# EAGLE board Cougar-eu_pcb_v54 (EAGLE 9.7.0)
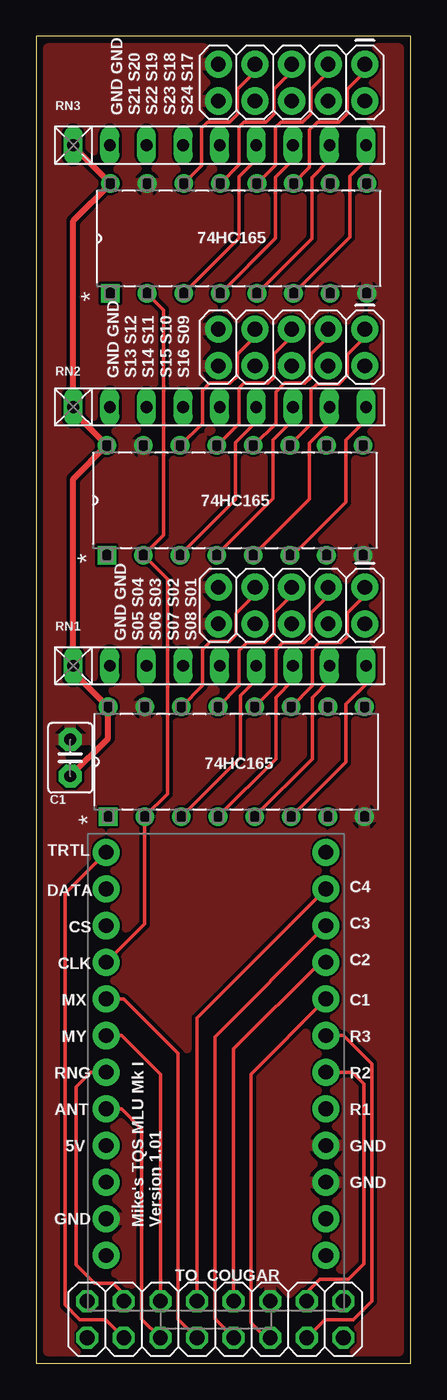
[diagram p0: board, top side]
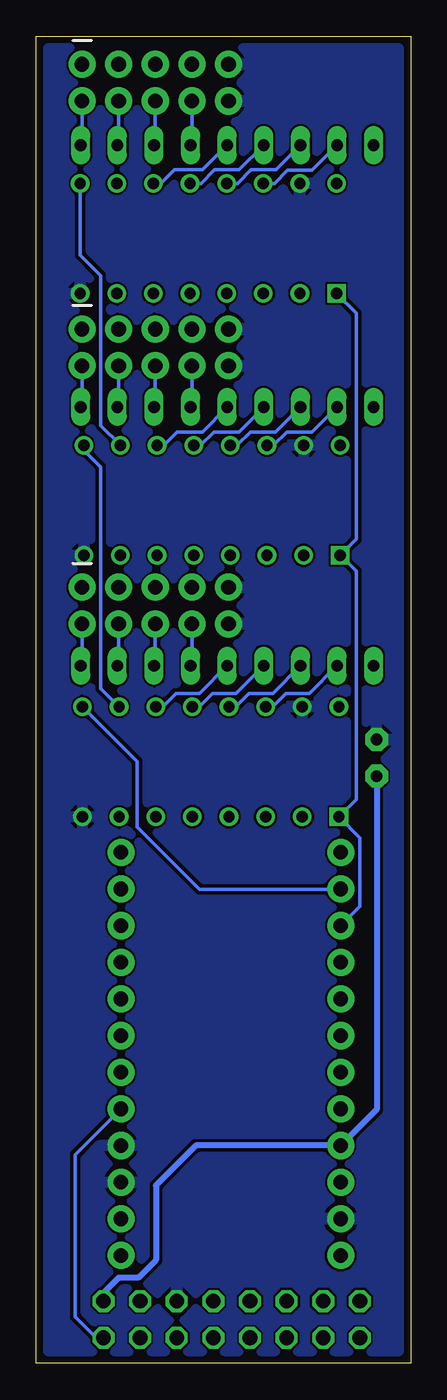
[diagram p1: board, bottom side, seen from below]

Size 26 x 92 mm. Coordinates in mm from the lower left corner, seen from the top.
Outline: 0,0 26,0 26,92 0,92 0,0
Copper layers (1*16): Top / Bottom
Stack-up Default Layer Stack: Top User Defined 0.035mm / Dielectric-1 User Defined 1.5mm / Bottom User Defined 0.035mm
Design rules "default *": minimum track width 10mil, minimum drill 0.5mm, track to track 10mil, track to pad 6mil, pad to pad 6mil, via to via 6mil, smd to smd 6mil, copper to edge 20mil, drill to drill 12mil, minimum pad ring 10mil, minimum via ring 8mil, stop-mask expansion 4mil, vias tented up to drill 0mil, thermal gap 10mil
Net classes: 1 Power: width 0.4 mm

## Footprints (pad centres in the part's own frame; a part is rotated, then mirrored left to right if it is on the bottom)
N16 = drill 0.787 pad 1.295 square: 1 -7.62,17.78 | drill 0.787 pad 1.295: 2 -7.62,15.24; 3 -7.62,12.7; 4 -7.62,10.16; 5 -7.62,7.62; 6 -7.62,5.08; 7 -7.62,2.54; 8 -7.62,0; 9 0,0; 10 0,2.54; 11 0,5.08; 12 0,7.62; 13 0,10.16; 14 0,12.7; 15 0,15.24; 16 0,17.78
SPARKFUN_PRO_MICRO = drill 1.016 pad 1.88: 1 -7.62,12.7; 2 -7.62,10.16; 3 -7.62,7.62; 4 -7.62,5.08; 5 -7.62,2.54; 6 -7.62,0; 7 -7.62,-2.54; 8 -7.62,-5.08; 9 -7.62,-7.62; 10 -7.62,-10.16; 11 -7.62,-12.7; 12 -7.62,-15.24; 13 7.62,-15.24; 14 7.62,-12.7; 15 7.62,-10.16; 16 7.62,-7.62; 17 7.62,-5.08; 18 7.62,-2.54; 19 7.62,0; 20 7.62,2.54; 21 7.62,5.08; 22 7.62,7.62; 23 7.62,10.16; 24 7.62,12.7
C2.5-3 = drill 0.813 pad 1.6 octagon: 1 -1.27,0; 2 1.27,0
RN-9 = drill 0.813 long: 1 -10.16,0; 2 -7.62,0; 3 -5.08,0; 4 -2.54,0; 5 0,0; 6 2.54,0; 7 5.08,0; 8 7.62,0; 9 10.16,0
2X5 = drill 1.016 pad 1.88: 1 0,0; 2 0,2.54; 3 2.54,0; 4 2.54,2.54; 5 5.08,0; 6 5.08,2.54; 7 7.62,0; 8 7.62,2.54; 9 10.16,0; 10 10.16,2.54
2X08 = drill 1.016 octagon: 1 -8.89,-1.27; 2 -8.89,1.27; 3 -6.35,-1.27; 4 -6.35,1.27; 5 -3.81,-1.27; 6 -3.81,1.27; 7 -1.27,-1.27; 8 -1.27,1.27; 9 1.27,-1.27; 10 1.27,1.27; 11 3.81,-1.27; 12 3.81,1.27; 13 6.35,-1.27; 14 6.35,1.27; 15 8.89,-1.27; 16 8.89,1.27

## Placement (x,y rotation side)
74HC165_1  SN74HC165NG4N16  [N16]  22.78,45.51 90 top
74HC165_2  SN74HC165NG4N16  [N16]  22.69,63.64 90 top
74HC165_3  SN74HC165NG4N16  [N16]  22.94,81.78 90 top
ARDUINO_PRO_MICRO  SPARKFUN_PRO_MICRO  [SPARKFUN_PRO_MICRO]  12.49,20.18 180 top
C1  100n  [C2.5-3]  2.37,41.98 270 top
RN1  10k  [RN-9]  12.74,48.36 0 top
RN2  10k  [RN-9]  12.74,66.29 0 top
RN3  10k  [RN-9]  12.74,84.44 0 top
S1  S01-08  [2X5]  22.81,53.8 180 top
S2  S09-16  [2X5]  22.81,71.69 180 top
S3  S17-24  [2X5]  22.81,90.04 180 top
TO_COUGAR  PINHD-2X8  [2X08]  12.43,3.05 180 top

## Library data of the parts
74HC165_1-74HC165_3 = 2022-07-30_21-57-33_Library; COPYRIGHT: Copyright (C) 2022 Ultra Librarian. All rights reserved.; MANUFACTURER_PART_NUMBER: SN74HC165NG4; MFR_NAME: Texas Instruments
ARDUINO_PRO_MICRO = SparkFun-Boards
C1 = capacitor-wima
RN1-RN3 = resistor-net; OC_FARNELL: unknown; OC_NEWARK: unknown
S1-S3 = SparkFun-Connectors; PROD_ID: CONN-08499; SF_ID: PRT-0778
TO_COUGAR = Connector; CATEGORY: CONNECTOR; SUB-CATEGORY: PIN-HEADER

## Nets
+5V [Power]: 74HC165_1.16 74HC165_2.16 74HC165_3.16 ARDUINO_PRO_MICRO.21 C1.2 RN1.1 RN2.1 RN3.1 TO_COUGAR.1
ANT: ARDUINO_PRO_MICRO.20 TO_COUGAR.12
AXTRTL: ARDUINO_PRO_MICRO.13 TO_COUGAR.14
C1: ARDUINO_PRO_MICRO.8 TO_COUGAR.6
C2: ARDUINO_PRO_MICRO.9 TO_COUGAR.7
C3: ARDUINO_PRO_MICRO.10 TO_COUGAR.8
C4: ARDUINO_PRO_MICRO.11 TO_COUGAR.9
GND: 74HC165_1.8 74HC165_1.15 74HC165_2.8 74HC165_2.15 74HC165_3.8 74HC165_3.15 ARDUINO_PRO_MICRO.3 ARDUINO_PRO_MICRO.4 ARDUINO_PRO_MICRO.23 C1.1 S1.9 S1.10 S2.9 S2.10 S3.9 S3.10 TO_COUGAR.5
MIX: ARDUINO_PRO_MICRO.17 TO_COUGAR.10
MIY: ARDUINO_PRO_MICRO.18 TO_COUGAR.11
N$1: 74HC165_1.10 74HC165_2.9
N$2: 74HC165_2.10 74HC165_3.9
R1: ARDUINO_PRO_MICRO.5 TO_COUGAR.2
R2: ARDUINO_PRO_MICRO.6 TO_COUGAR.3
R3: ARDUINO_PRO_MICRO.7 TO_COUGAR.4
RAW: ARDUINO_PRO_MICRO.24
RNG: ARDUINO_PRO_MICRO.19 TO_COUGAR.13
S01: 74HC165_1.11 RN1.5 S1.1
S02: 74HC165_1.12 RN1.4 S1.3
S03: 74HC165_1.13 RN1.3 S1.5
S04: 74HC165_1.14 RN1.2 S1.7
S05: 74HC165_1.3 RN1.6 S1.8
S06: 74HC165_1.4 RN1.7 S1.6
S07: 74HC165_1.5 RN1.8 S1.4
S08: 74HC165_1.6 RN1.9 S1.2
S09: 74HC165_2.11 RN2.5 S2.1
S10: 74HC165_2.12 RN2.4 S2.3
S11: 74HC165_2.13 RN2.3 S2.5
S12: 74HC165_2.14 RN2.2 S2.7
S13: 74HC165_2.3 RN2.6 S2.8
S14: 74HC165_2.4 RN2.7 S2.6
S15: 74HC165_2.5 RN2.8 S2.4
S16: 74HC165_2.6 RN2.9 S2.2
S17: 74HC165_3.11 RN3.5 S3.1
S18: 74HC165_3.12 RN3.4 S3.3
S19: 74HC165_3.13 RN3.3 S3.5
S20: 74HC165_3.14 RN3.2 S3.7
S21: 74HC165_3.3 RN3.6 S3.8
S22: 74HC165_3.4 RN3.7 S3.6
S23: 74HC165_3.5 RN3.8 S3.4
S24: 74HC165_3.6 RN3.9 S3.2
SCLK: 74HC165_1.2 74HC165_2.2 74HC165_3.2 ARDUINO_PRO_MICRO.16
SLOAD: 74HC165_1.1 74HC165_2.1 74HC165_3.1 ARDUINO_PRO_MICRO.15
SOUT: 74HC165_1.9 ARDUINO_PRO_MICRO.14

## Tracks (layer width: path | path; a pad name or v marks a point on that pad's centre or on a via)
+5V
  Top 0.4: C1.2 5,43.33 74HC165_1.16 2.58,47.93 RN1.1 2.58,61.31 74HC165_2.16 2.58,65.96 RN2.1 2.58,79.2 74HC165_3.16 2.58,84.36 RN3.1
  Bottom 0.4: TO_COUGAR.1 21.32,4.89 20.27,5.94 18.9,5.94 17.68,7.16 17.68,12.34 14.92,15.1 ARDUINO_PRO_MICRO.21 2.37,17.6 C1.2
ANT
  Top 0.254: TO_COUGAR.12 7.34,3.06 7.34,16.24 5.93,17.64 ARDUINO_PRO_MICRO.20
AXTRTL
  Top 0.254: TO_COUGAR.14 4.82,3.04 3.04,3.04 2.02,4.05 2.02,32.58 ARDUINO_PRO_MICRO.13
C1
  Top 0.254: ARDUINO_PRO_MICRO.8 14.9,20.05 14.9,2.82 15.94,1.78 TO_COUGAR.6
C2
  Top 0.254: TO_COUGAR.7 13.7,21.8 19.71,27.8 ARDUINO_PRO_MICRO.9
C3
  Top 0.254: ARDUINO_PRO_MICRO.10 12.4,22.63 12.4,3.08 TO_COUGAR.8
C4
  Top 0.254: TO_COUGAR.9 11.16,23.94 ARDUINO_PRO_MICRO.11
GND
  pour Bottom: 26.01,0 0,0 0,92 26.01,92
  pour Top: 26.42,0 0,0 0,92.3 26.42,92.3
MIX
  Top 0.254: TO_COUGAR.10 9.87,3.07 9.87,21.48 6.09,25.26 ARDUINO_PRO_MICRO.17
MIY
  Top 0.254: TO_COUGAR.11 8.62,20.04 5.93,22.72 ARDUINO_PRO_MICRO.18
N$1
  Bottom 0.254: 74HC165_1.10 21.5,46.78 21.5,62.12 22.69,63.3 74HC165_2.9
N$2
  Bottom 0.254: 74HC165_3.9 22.94,76.83 21.5,75.39 21.5,64.99 74HC165_2.10
R1
  Bottom 0.254: TO_COUGAR.2 21.83,1.78 23.28,3.23 23.28,14.47 ARDUINO_PRO_MICRO.5
R2
  Top 0.254: TO_COUGAR.3 18.78,4.93 19.7,5.84 21.68,5.84 22.74,6.91 22.74,19.37 21.94,20.18 ARDUINO_PRO_MICRO.6
R3
  Top 0.254: TO_COUGAR.4 20.04,3.04 22.01,3.04 23.28,4.3 23.28,20.77 21.33,22.72 ARDUINO_PRO_MICRO.7
RNG
  Top 0.254: TO_COUGAR.13 6.08,4.82 5.34,5.57 4.05,5.57 2.78,6.83 2.78,19.17 3.8,20.18 ARDUINO_PRO_MICRO.19
S01
  Top 0.254: S1.1 22.81,53.24 21.59,52.02 21.59,50.4 21.16,49.96 19.67,49.96 19.16,49.46 19.16,46.98 74HC165_1.11
  Bottom 0.254: RN1.5 14.66,46.44 16.3,46.44 17.23,45.52 74HC165_1.11
S02
  Top 0.254: S1.3 20.27,53.24 19.05,52.02 19.05,50.4 18.61,49.96 17.13,49.96 16.62,49.46 16.62,46.98 74HC165_1.12
  Bottom 0.254: RN1.4 12.12,46.44 13.76,46.44 14.69,45.52 74HC165_1.12
S03
  Top 0.254: 74HC165_1.13 14.09,46.98 14.09,49.41 14.64,49.96 15.87,49.96 16.51,50.6 16.51,52.02 17.73,53.24 S1.5
  Bottom 0.254: RN1.3 9.58,46.44 11.22,46.44 12.15,45.52 74HC165_1.13
S04
  Top 0.254: 74HC165_1.14 11.54,46.97 11.54,49.49 12.09,50.04 13.41,50.04 13.87,50.5 13.87,51.97 15.19,53.29 S1.7
  Bottom 0.254: RN1.2 7.04,46.44 8.68,46.44 9.61,45.52 74HC165_1.14
S05
  Top 0.254: RN1.6 15.28,47.41 14.17,46.3 14.17,41.98 74HC165_1.3
  Bottom 0.254: S1.8 15.19,48.45 RN1.6
S06
  Top 0.254: RN1.7 17.82,47.35 16.63,46.16 16.63,41.9 74HC165_1.4
  Bottom 0.254: S1.6 17.73,48.45 RN1.7
S07
  Top 0.254: RN1.8 20.36,47.35 19.17,46.16 19.17,41.9 74HC165_1.5
  Bottom 0.254: S1.4 20.27,48.45 RN1.8
S08
  Top 0.254: 74HC165_1.6 21.5,41.7 21.5,45.7 22.9,47.1 RN1.9
  Bottom 0.254: S1.2 22.81,48.45 RN1.9
S09
  Top 0.254: 74HC165_2.11 19.07,65.1 19.07,67.49 19.46,67.89 20.99,67.89 21.59,68.49 21.59,69.91 22.81,71.13 S2.1
  Bottom 0.254: RN2.5 14.47,64.56 16.21,64.56 17.14,63.63 74HC165_2.11
S10
  Top 0.254: S2.3 20.27,71.18 19.05,69.96 19.05,68.34 18.64,67.93 17.22,67.93 16.62,67.34 16.62,65.14 15.12,63.63 74HC165_2.12
  Bottom 0.254: RN2.4 11.93,64.56 13.67,64.56 14.6,63.63 74HC165_2.12
S11
  Top 0.254: S2.5 17.73,71.18 16.51,69.96 16.51,68.34 16.1,67.93 14.42,67.93 14.09,67.59 14.09,65.14 12.58,63.63 74HC165_2.13
  Bottom 0.254: RN2.3 9.39,64.56 11.13,64.56 12.06,63.63 74HC165_2.13
S12
  Top 0.254: S2.7 15.19,71.18 13.97,69.96 13.97,68.44 13.46,67.93 12.04,67.93 11.54,67.44 11.54,65.14 10.04,63.63 74HC165_2.14
  Bottom 0.254: RN2.2 6.85,64.56 8.59,64.56 9.52,63.63 74HC165_2.14
S13
  Top 0.254: RN2.6 15.28,65.28 13.83,63.83 13.83,59.86 74HC165_2.3
  Bottom 0.254: S2.8 15.19,66.38 RN2.6
S14
  Top 0.254: RN2.7 17.82,65.38 16.45,64.01 16.45,59.93 74HC165_2.4
  Bottom 0.254: S2.6 17.73,66.38 RN2.7
S15
  Top 0.254: 74HC165_2.5 18.98,59.92 18.98,63.77 20.36,65.16 RN2.8
  Bottom 0.254: S2.4 20.27,66.38 RN2.8
S16
  Top 0.254: RN2.9 22.9,65.4 21.5,64.01 21.5,59.71 17.81,56.02 74HC165_2.6
  Bottom 0.254: S2.2 22.81,66.38 RN2.9
S17
  Top 0.254: 74HC165_3.11 18.98,82.9 18.98,85.51 19.5,86.04 20.75,86.04 20.77,86.02 21,86.02 21.59,86.61 21.59,88.32 22.81,89.54 S3.1
  Bottom 0.254: RN3.5 14.45,82.73 16.4,82.73 17.35,81.78 74HC165_3.11
S18
  Top 0.254: 74HC165_3.12 16.6,83.06 16.6,85.67 16.97,86.04 18.49,86.04 19.05,86.59 19.05,88.32 20.27,89.54 S3.3
  Bottom 0.254: RN3.4 11.91,82.73 13.62,82.73 14.57,81.78 74HC165_3.12
S19
  Top 0.254: 74HC165_3.13 14.07,83.07 14.07,85.67 14.44,86.04 15.95,86.04 16.51,86.59 16.51,88.32 17.73,89.54 S3.5
  Bottom 0.254: 74HC165_3.13 12.03,81.78 11.08,82.73 9.37,82.73 RN3.3
S20
  Top 0.254: 74HC165_3.14 11.49,83.03 11.49,85.61 11.91,86.04 13.41,86.04 13.97,86.59 13.97,88.32 15.19,89.54 S3.7
  Bottom 0.254: RN3.2 6.85,82.71 8.55,82.71 9.48,81.78 74HC165_3.14
S21
  Top 0.254: RN3.6 15.28,83.46 14.07,82.24 14.07,77.99 74HC165_3.3
  Bottom 0.254: S3.8 15.19,84.53 RN3.6
S22
  Top 0.254: RN3.7 17.82,83.43 16.6,82.2 16.6,77.98 74HC165_3.4
  Bottom 0.254: S3.6 17.73,84.53 RN3.7
S23
  Top 0.254: RN3.8 20.36,83.43 19.13,82.19 19.13,77.97 74HC165_3.5
  Bottom 0.254: S3.4 20.27,84.53 RN3.8
S24
  Top 0.254: RN3.9 22.9,83.43 21.76,82.28 21.76,78.06 74HC165_3.6
  Bottom 0.254: S3.2 22.81,84.53 RN3.9
SCLK
  Top 0.254: ARDUINO_PRO_MICRO.16 7.54,30.48 74HC165_1.2 9.11,39.46 9.11,54.35 74HC165_2.2 8.86,57.42 8.86,73.01 74HC165_3.2
SLOAD
  Bottom 0.254: ARDUINO_PRO_MICRO.15 3.54,31.67 3.54,36.44 74HC165_1.1 3.79,39.1 3.79,54.9 74HC165_2.1 3.79,57.13 3.79,72.8 74HC165_3.1
SOUT
  Bottom 0.254: 74HC165_1.9 18.98,41.71 18.98,37.19 14.65,32.87 4.88,32.87 ARDUINO_PRO_MICRO.14

## Text on the board
tNames: GND GND / S21 S20 / S22 S19 / S23 S18 / S24 S17 | 74HC165 | GND GND / S13 S12 / S14 S11 / S15 S10 / S16 S09 | 74HC165 | GND GND / S05 S04 / S06 S03 / S07 S02 / S08 S01 | 74HC165 | TRTL | C4 | DATA | CS | C3 | C2 | CLK | MX | C1 | MY | R3 | RNG | R2 | ANT | R1 | 5V | GND | GND | GND | Mike's TQS MLU Mk I / Version 1.01